# Altium PCB PCB2.PcbDoc
Units mil, origin at the board's own origin, x right, y up, seen from the top; angles counter-clockwise.
Board outline 4260 x 2695 mil, 2 copper layers (Top Layer, Bottom Layer); 24 components, 15 nets, 153 pads, 0 vias.
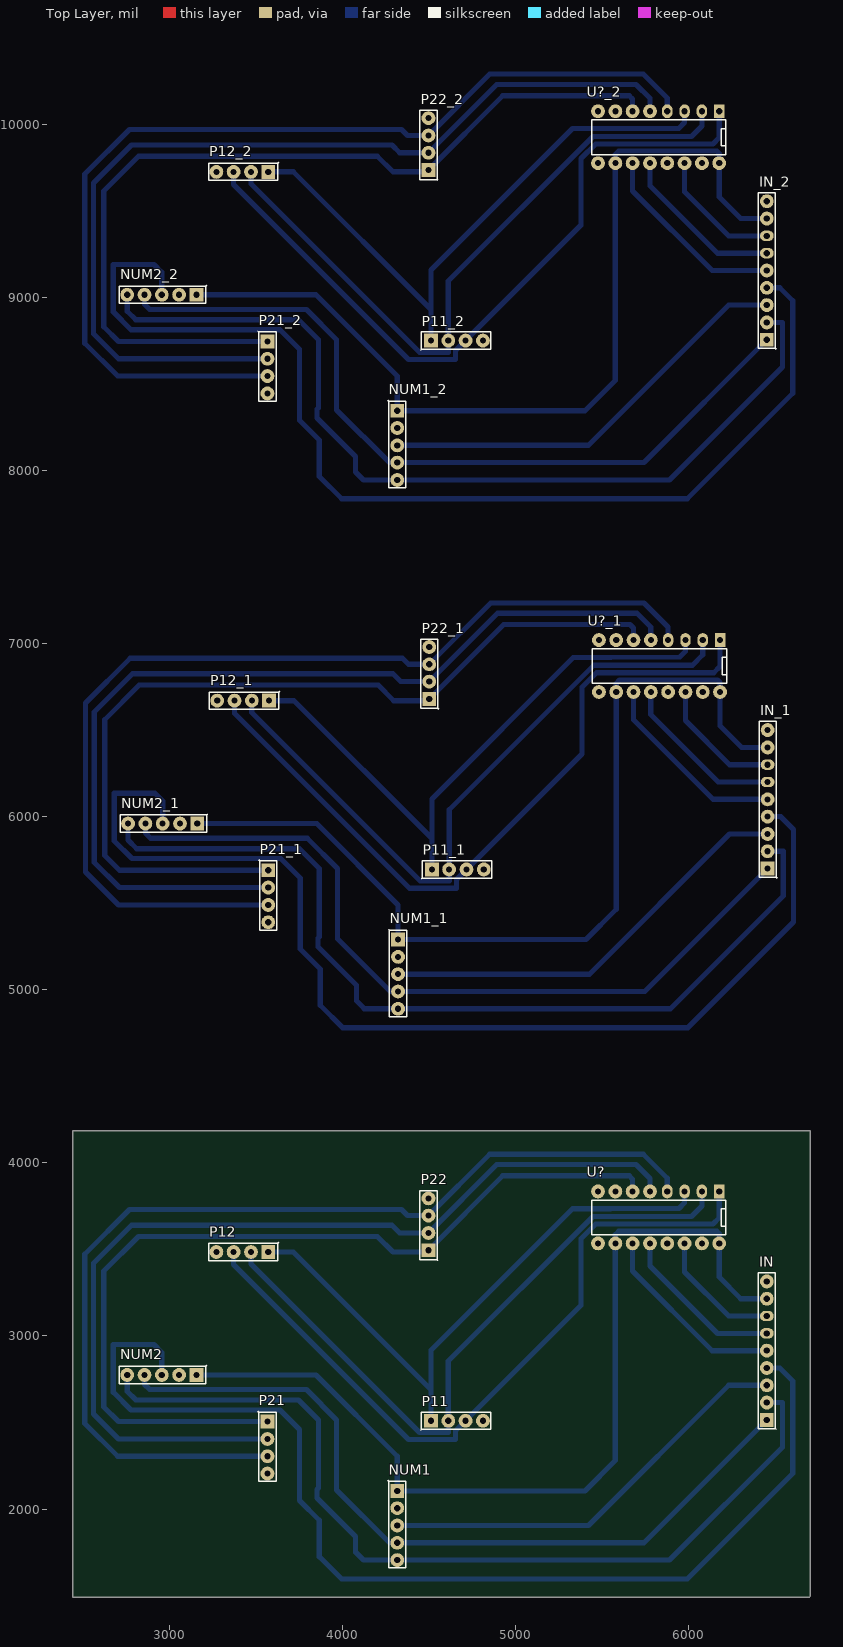
[diagram p0: Top Layer view]
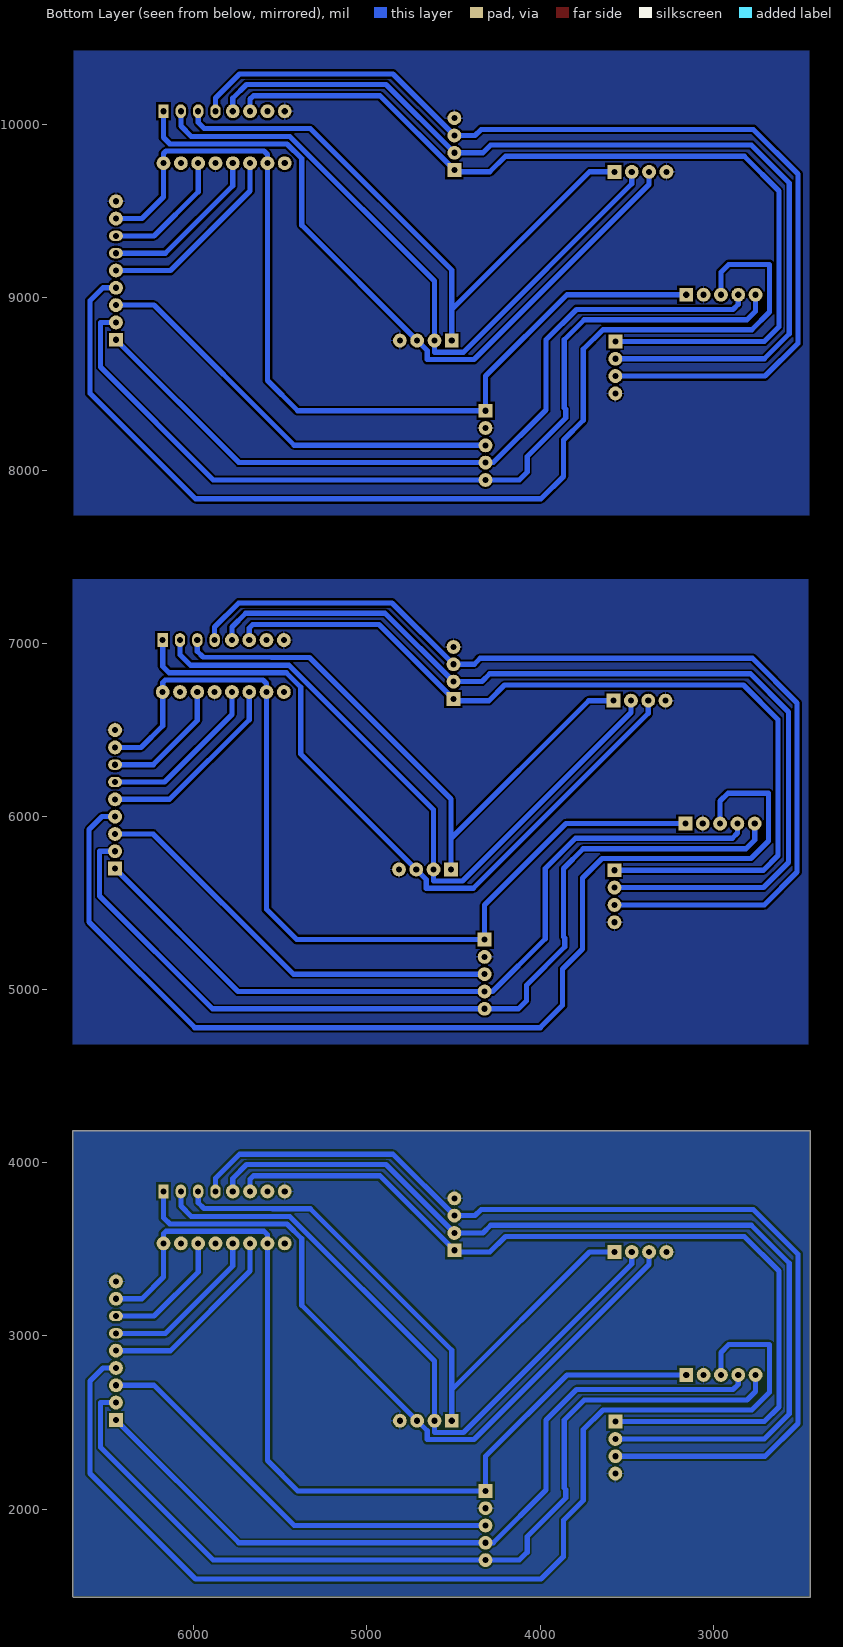
[diagram p1: Bottom Layer view, seen from below]

## Layer stack, top to bottom
Top Solder: solder mask 0.4, Solder Resist, Dk 3.5
Top Layer: signal copper 1.4
Dielectric 1: dielectric 12.6, FR-4, Dk 4.8
Bottom Layer: signal copper 1.4
Bottom Solder: solder mask 0.4, Solder Resist, Dk 3.5

## Board outline
2440,4185 2440,1490 6695,1490 6700,1495 6700,4185

## Design rules (kind name [scope] priority, off if disabled: settings)
Clearance [All] p1: gap=12 ignorepadtopadclearanceinfootprint=FALSE
PolygonConnect [All] p1: connectstyle=Relief reliefconductorwidth=10 reliefentries=4 polygonreliefangle="90 Angle" airgapwidth=10
RoutingVias [All] p1: holewidth=28 width=50 viastyle="Through Hole" minholewidth=28 minwidth=50 maxholewidth=28 maxwidth=50
SolderMaskExpansion [All] p1: expansion=4
Width [All] p1: maxlimit=30 minlimit=20 preferedwidth=30
30 further rules are at their usual default settings.

## Classes and differential pairs
component class Sheet2: IN NUM1 NUM2 P11 P12 P21 P22 U?

## Components (designator, comment, footprint, x,y, rotation, side; value= is the part's Value field where it differs from the comment)
IN "Header 9" "Header 9" 6450,2515 r90 top
IN_1 "Header 9" "Header 9" 6455,5700 r90 top (schematic designator IN)
IN_2 "Header 9" "Header 9" 6450,8755 r90 top (schematic designator IN)
NUM1 "Header 5" "Header 5" 4315,2105 r270 top
NUM1_1 "Header 5" "Header 5" 4320,5290 r270 top (schematic designator NUM1)
NUM1_2 "Header 5" "Header 5" 4315,8345 r270 top (schematic designator NUM1)
NUM2 "Header 5" "Header 5" 3155,2775 r180 top
NUM2_1 "Header 5" "Header 5" 3160,5960 r180 top (schematic designator NUM2)
NUM2_2 "Header 5" "Header 5" 3155,9015 r180 top (schematic designator NUM2)
P11 "Header 4" "Header 4" 4510,2510 r0 top
P11_1 "Header 4" "Header 4" 4515,5695 r0 top (schematic designator P11)
P11_2 "Header 4" "Header 4" 4510,8750 r0 top (schematic designator P11)
P12 "Header 4" "Header 4" 3570,3485 r180 top
P12_1 "Header 4" "Header 4" 3575,6670 r180 top (schematic designator P12)
P12_2 "Header 4" "Header 4" 3570,9725 r180 top (schematic designator P12)
P21 "Header 4" "Header 4" 3565,2505 r270 top
P21_1 "Header 4" "Header 4" 3570,5690 r270 top (schematic designator P21)
P21_2 "Header 4" "Header 4" 3565,8745 r270 top (schematic designator P21)
P22 "Header 4" "Header 4" 4495,3495 r90 top
P22_1 "Header 4" "Header 4" 4500,6680 r90 top (schematic designator P22)
P22_2 "Header 4" "Header 4" 4495,9735 r90 top (schematic designator P22)
U? "74HC595" "DIP 16" 6175,3835 r180 top
U?_1 "74HC595" "DIP 16" 6180,7020 r180 top (schematic designator U?)
U?_2 "74HC595" "DIP 16" 6175,10075 r180 top (schematic designator U?)

## Footprints (in the part's own frame and the unit in brackets; to place one, negate y for a bottom-side part, rotate by r counter-clockwise, add the part's x,y. Pads: shape width x height; smd on the part's side, far side on the other; paste and mask are expansions set on the pad)
"DIP 16" [mil]
  rect 60x80 hole 35.43: 1(0,0)
  oval 60x80 hole 35.43: 2(100,0) 3(200,0) 4(300,0)
  round 80 hole 35.43: 5(400,0) 6(500,0) 7(600,0) 8(700,0) 9(700,300) 10(600,300) 11(500,300) 12(400,300) 13(300,300) 14(200,300) 15(100,300) 16(0,300)
  silkscreen extent -38,50 738,250, body extent -75,-3 775,307, height 185
"Header 4" [mil]
  rect 80x80 hole 35.43: 1(0,0)
  round 80 hole 35.43: 2(100,0) 3(200,0) 4(300,0)
  silkscreen extent -60,-55 345,50, body extent -50,-50 350,50, height 350
"Header 5" [mil]
  rect 80x80 hole 35.43: 1(0,0)
  round 80 hole 35.43: 2(100,0) 3(200,0) 4(300,0) 5(400,0)
  silkscreen extent -60,-55 445,50, body extent -50,-50 450,50, height 350
"Header 9" [mil]
  rect 80x80 hole 35.43: 1(0,0)
  round 80 hole 35.43: 2(100,0) 3(200,0) 4(300,0) 5(400,0) 8(700,0) 9(800,0)
  oval 60x80 hole 35.43: 6(500,0) 7(600,0)
  silkscreen extent -55,-55 850,50, body extent -50,-53 850,45, height 336

## Part data
IN IN_1 IN_2: "Header, 9-Pin", LatestRevisionDate=17-Jul-2002, LatestRevisionNote="Re-released for DXP Platform.", Publisher="Altium Limited"
NUM1 NUM1_1 NUM1_2 NUM2 NUM2_1 NUM2_2: "Header, 5-Pin", LatestRevisionDate=17-Jul-2002, LatestRevisionNote="Re-released for DXP Platform.", Publisher="Altium Limited"
P11 P11_1 P11_2 P12 P12_1 P12_2 P21 P21_1 P21_2 P22 P22_1 P22_2: "Header, 4-Pin"
U? U?_1 U?_2: "8-bit serial-in, serial or parallel-out  shift register with output latches;  3-state"

## Nets (pads, with @x,y where several pads share a name; then routed paths per layer and width w, separated by ;. In a path a pad name is that pad's centre, name@x,y a point inside that pad or via, vN(x,y) a via of type N, cw(c..) or ccw(c..) an arc to the next point about the centre after c; other vN are vias at no path point)
GND: IN.9 NUM1.2 NUM2.2 P11.4 P12.4 P21.4 P22.4 U?.8 U?.13
NetIN_1: IN.1 NUM1.4 NUM2.4 | length 4560.3
  Bottom Layer w30: NUM2.4 2855,2720 2885,2690 3790,2690 3965,2515 3965,2110 4270,1805 NUM1.4 5740,1805 IN.1
NetIN_2: IN.2 NUM1.5 NUM2.5 | length 5230.7
  Bottom Layer w30: NUM2.5 2755,2680 2805,2630 3745,2630 3860,2515 3860,2121 3852,2113 3852,2063 4074,1841 4074,1751 4120,1705 NUM1.5 5888,1705 6540,2357 6540,2615 IN.2
NetIN_3: IN.3 NUM1.3 | length 2470.5
  Bottom Layer w30: NUM1.3 5420,1905 6230,2715 IN.3
NetIN_4: IN.4 NUM2.3 | length 6406.5
  Bottom Layer w30: NUM2.3 2955,2905 2910,2950 2675,2950 2675,2675 2777,2573 3637,2573 3750,2460 3750,2050 3865,1935 3865,1725 3994,1596 5990,1596 6600,2206 6600,2740 6525,2815 IN.4
NetIN_5: IN.5 U?.11 | length 1125.5
  Bottom Layer w30: U?.11 5675,3375 6135,2915 IN.5
NetIN_6: IN.6 U?.12 | length 966.5
  Bottom Layer w30: U?.12 5775,3405 6165,3015 IN.6
NetIN_7: IN.7 U?.14 | length 745.6
  Bottom Layer w30: U?.14 5975,3370 6230,3115 IN.7
NetP11_1: P11.1 P12.1 U?.3 | length 3559.5
  Bottom Layer w30: P12.1 3714,3485 4510,2689 ; P11.1 4510,2689 ; U?.3 5975,3770 5942.12,3737.12 5545.05,3734.76 5326.98,3734.76 4510,2917.78 4510,2689
NetP11_2: P11.2 P12.2 U?.2 | length 3944.4
  Bottom Layer w30: P12.2 3470,3416 4443,2443 4610,2443 P11.2 4610,2854.4 5445.6,3690 6015,3690 6075,3750 U?.2
NetP11_3: P11.3 P12.3 U?.1 | length 4235.2
  Bottom Layer w30: P12.3 3370,3412 4381,2401 4652,2401 4652,2452 P11.3 5376.97,3176.97 5376.97,3561.97 5461.59,3646.59 6138.59,3646.59 6175,3683 U?.1
NetP21_1: P21.1 P22.1 U?.6 | length 5200.9
  Bottom Layer w30: P21.1 2705,2505 2620,2590 2620,3375 2820,3575 4200,3575 4290,3485 4485,3485 P22.1 4925,3925 5655,3925 5675,3905 U?.6
NetP21_2: P21.2 P22.2 U?.5 | length 5531.6
  Bottom Layer w30: P21.2 2705,2405 2560,2550 2560,3420 2780,3640 4285,3640 4330,3595 P22.2 4890,3990 5695,3990 5775,3910 U?.5
NetP21_3: P21.3 P22.3 U?.4 | length 5877.7
  Bottom Layer w30: P21.3 2700,2305 2510,2495 2510,3472 2768,3730 4340,3730 4375,3695 P22.3 4850,4050 5736,4050 5875,3911 U?.4
VCC: IN.8 NUM1.1 NUM2.1 U?.10 U?.16 | length 5383.1
  Bottom Layer w30: NUM2.1 3845,2775 4315,2305 NUM1.1 5400,2105 5575,2280 U?.10 5575,3585 5594.59,3604.59 6160.41,3604.59 6175,3590 U?.16 6175,3340 6300,3215 IN.8
pads on no net: IN_1.1 IN_1.2 IN_1.3 IN_1.4 IN_1.5 IN_1.6 IN_1.7 IN_1.8 IN_1.9 IN_2.1 IN_2.2 IN_2.3 IN_2.4 IN_2.5 IN_2.6 IN_2.7 IN_2.8 IN_2.9 NUM1_1.1 NUM1_1.2 NUM1_1.3 NUM1_1.4 NUM1_1.5 NUM1_2.1 NUM1_2.2 NUM1_2.3 NUM1_2.4 NUM1_2.5 NUM2_1.1 NUM2_1.2 NUM2_1.3 NUM2_1.4 NUM2_1.5 NUM2_2.1 NUM2_2.2 NUM2_2.3 NUM2_2.4 NUM2_2.5 P11_1.1 P11_1.2 P11_1.3 P11_1.4 P11_2.1 P11_2.2 P11_2.3 P11_2.4 P12_1.1 P12_1.2 P12_1.3 P12_1.4 P12_2.1 P12_2.2 P12_2.3 P12_2.4 P21_1.1 P21_1.2 P21_1.3 P21_1.4 P21_2.1 P21_2.2 P21_2.3 P21_2.4 P22_1.1 P22_1.2 P22_1.3 P22_1.4 P22_2.1 P22_2.2 P22_2.3 P22_2.4 U?.7 U?.9 U?.15 U?_1.1 U?_1.2 U?_1.3 U?_1.4 U?_1.5 U?_1.6 U?_1.7 U?_1.8 U?_1.9 U?_1.10 U?_1.11 U?_1.12 U?_1.13 U?_1.14 U?_1.15 U?_1.16 U?_2.1 U?_2.2 U?_2.3 U?_2.4 U?_2.5 U?_2.6 U?_2.7 U?_2.8 U?_2.9 U?_2.10 U?_2.11 U?_2.12 U?_2.13 U?_2.14 U?_2.15 U?_2.16
copper on no net: | length 110476.3
  Bottom Layer w30: 2755,9015 2755,8920 2805,8870 3745,8870 3860,8755 3860,8361 3852,8353 3852,8303 4074,8081 4074,7991 4120,7945 4315,7945 5888,7945 6540,8597 6540,8855 6450,8855 ; 2760,5960 2760,5865 2810,5815 3750,5815 3865,5700 3865,5306 3857,5298 3857,5248 4079,5026 4079,4936 4125,4890 4320,4890 5893,4890 6545,5542 6545,5800 6455,5800 ; 2855,9015 2855,8960 2885,8930 3790,8930 3965,8755 3965,8350 4270,8045 4315,8045 5740,8045 6450,8755 ; 2860,5960 2860,5905 2890,5875 3795,5875 3970,5700 3970,5295 4275,4990 4320,4990 5745,4990 6455,5700 ; 2955,9015 2955,9145 2910,9190 2675,9190 2675,8915 2777,8813 3637,8813 3750,8700 3750,8290 3865,8175 3865,7965 3994,7836 5990,7836 6600,8446 6600,8980 6525,9055 6450,9055 ; 2960,5960 2960,6090 2915,6135 2680,6135 2680,5860 2782,5758 3642,5758 3755,5645 3755,5235 3870,5120 3870,4910 3999,4781 5995,4781 6605,5391 6605,5925 6530,6000 6455,6000 ; 3155,9015 3845,9015 4315,8545 4315,8345 5400,8345 5575,8520 5575,9775 5575,9825 5594.59,9844.59 6160.41,9844.59 6175,9830 6175,9775 6175,9580 6300,9455 6450,9455 ; 3160,5960 3850,5960 4320,5490 4320,5290 5405,5290 5580,5465 5580,6720 5580,6770 5599.59,6789.59 6165.41,6789.59 6180,6775 6180,6720 6180,6525 6305,6400 6455,6400 ; 3370,9725 3370,9652 4381,8641 4652,8641 4652,8692 4710,8750 5376.97,9416.97 5376.97,9801.97 5461.59,9886.59 6138.59,9886.59 6175,9923 6175,10075 ; 3375,6670 3375,6597 4386,5586 4657,5586 4657,5637 4715,5695 5381.97,6361.97 5381.97,6746.97 5466.59,6831.59 6143.59,6831.59 6180,6868 6180,7020 ; 3470,9725 3470,9656 4443,8683 4610,8683 4610,8750 4610,9094.4 5445.6,9930 6015,9930 6075,9990 6075,10075 ; 3475,6670 3475,6601 4448,5628 4615,5628 4615,5695 4615,6039.4 5450.6,6875 6020,6875 6080,6935 6080,7020 ; 3565,8545 2700,8545 2510,8735 2510,9712 2768,9970 4340,9970 4375,9935 4495,9935 4850,10290 5736,10290 5875,10151 5875,10075 ; 3565,8645 2705,8645 2560,8790 2560,9660 2780,9880 4285,9880 4330,9835 4495,9835 4890,10230 5695,10230 5775,10150 5775,10075 ; 3565,8745 2705,8745 2620,8830 2620,9615 2820,9815 4200,9815 4290,9725 4485,9725 4495,9735 4925,10165 5655,10165 5675,10145 5675,10075 ; 3570,5490 2705,5490 2515,5680 2515,6657 2773,6915 4345,6915 4380,6880 4500,6880 4855,7235 5741,7235 5880,7096 5880,7020 ; 3570,5590 2710,5590 2565,5735 2565,6605 2785,6825 4290,6825 4335,6780 4500,6780 4895,7175 5700,7175 5780,7095 5780,7020 ; 3570,5690 2710,5690 2625,5775 2625,6560 2825,6760 4205,6760 4295,6670 4490,6670 4500,6680 4930,7110 5660,7110 5680,7090 5680,7020 ; 3570,9725 3714,9725 4510,8929 ; 3575,6670 3719,6670 4515,5874 ; 4315,8145 5420,8145 6230,8955 6450,8955 ; 4320,5090 5425,5090 6235,5900 6455,5900 ; 4510,8750 4510,8929 ; 4515,5695 4515,5874 ; 5675,9775 5675,9615 6135,9155 6450,9155 ; 5680,6720 5680,6560 6140,6100 6455,6100 ; 5775,9775 5775,9645 6165,9255 6450,9255 ; 5780,6720 5780,6590 6170,6200 6455,6200 ; 5975,9775 5975,9610 6230,9355 6450,9355 ; 5975,10075 5975,10010 5942.12,9977.12 5545.05,9974.76 5326.98,9974.76 4510,9157.78 4510,8929 ; 5980,6720 5980,6555 6235,6300 6455,6300 ; 5980,7020 5980,6955 5947.12,6922.12 5550.05,6919.76 5331.98,6919.76 4515,6102.78 4515,5874

## Polygon pours and split planes (outlines as drawn)
no net on Bottom Layer "Bottom Layer-GND" (solid, pour order 16): 2440,10435 2445,10430 2445,7740 6695,7740 6695,10425 2445,10425 2440,10420
no net on Bottom Layer "Bottom Layer-GND" (solid, pour order 14): 2445,7380 2450,7375 2450,4685 6700,4685 6700,7370 2450,7370 2445,7365
GND on Bottom Layer "Bottom Layer-GND" (solid, pour order 2): 2440,4195 2445,4190 2445,1500 6695,1500 6695,4185 2445,4185 2440,4180